# EAGLE board CT_schematic (EAGLE 7.6.0)

Size 100 x 80 mm. Coordinates in mm from the lower left corner, seen from the top.
Outline: 0,0 100,0 100,80 0,80 0,0
Copper layers (1*16): Top 0.035mm / dielectric 1.5mm / Bottom 0.035mm
Design rules "default": minimum track width 10mil, minimum drill 24mil, track to track 8mil, track to pad 8mil, pad to pad 8mil, via to via 8mil, smd to smd 8mil, copper to edge 40mil, drill to drill 8mil, minimum pad ring 10mil, minimum via ring 8mil, stop-mask expansion 4mil, vias tented up to drill 0mil, thermal gap 10mil

## Footprints (pad centres in the part's own frame; a part is rotated, then mirrored left to right if it is on the bottom)
C0603 = smd 0.8 x 0.8: 1 -0.762,0; 2 0.762,0
C0402 = smd 0.5 x 0.5: 1 -0.508,0; 2 0.508,0
C1206 = smd 1.3 x 1.6: 1 -1.524,0; 2 1.524,0
C0805 = smd 1.2 x 1.3: 1 -1.016,0; 2 1.016,0
C1210 = smd 1.2 x 2.5: 1 -1.524,0; 2 1.524,0
R0603 = smd 0.8 x 0.8: 1 -0.762,0; 2 0.762,0
EXV-9H = smd 3.505 x 1.676: 1 -2.857,0; 2 2.857,0
L0603 = smd 0.8 x 0.8: 1 -0.762,0; 2 0.762,0
DR1040 = smd 1.6 x 3.2: 1 -4.458,0; 2 4.458,0
PJ-037B_PACKAGE = drill 3.7 square: 1 12,0 | drill 3.2 square: 2 6,0
TFBGA216 = smd 0.4 x 0.4: A1 -5.6,5.6; A2 -4.8,5.6; A3 -4,5.6; A4 -3.2,5.6; A5 -2.4,5.6; A6 -1.6,5.6; A7 -0.8,5.6; A8 0,5.6; A9 0.8,5.6; A10 1.6,5.6; A11 2.4,5.6; A12 3.2,5.6; A13 4,5.6; A14 4.8,5.6; A15 5.6,5.6; B1 -5.6,4.8; B2 -4.8,4.8; B3 -4,4.8; B4 -3.2,4.8; B5 -2.4,4.8; B6 -1.6,4.8; B7 -0.8,4.8; B8 0,4.8; B9 0.8,4.8; B10 1.6,4.8; B11 2.4,4.8; B12 3.2,4.8; B13 4,4.8; B14 4.8,4.8; B15 5.6,4.8; C1 -5.6,4; C2 -4.8,4; C3 -4,4; C4 -3.2,4; C5 -2.4,4; C6 -1.6,4; C7 -0.8,4; C8 0,4; C9 0.8,4; C10 1.6,4; C11 2.4,4; C12 3.2,4; C13 4,4; C14 4.8,4; C15 5.6,4; D1 -5.6,3.2; D2 -4.8,3.2; D3 -4,3.2; D4 -3.2,3.2; D5 -2.4,3.2; D6 -1.6,3.2; D7 -0.8,3.2; D8 0,3.2; D9 0.8,3.2; D10 1.6,3.2; D11 2.4,3.2; D12 3.2,3.2; D13 4,3.2; D14 4.8,3.2; D15 5.6,3.2; E1 -5.6,2.4; E2 -4.8,2.4; E3 -4,2.4; E4 -3.2,2.4; E5 -2.4,2.4; E6 -1.6,2.4; E7 -0.8,2.4; E8 0,2.4; E9 0.8,2.4; E10 1.6,2.4; E11 2.4,2.4; E12 3.2,2.4; E13 4,2.4; E14 4.8,2.4; E15 5.6,2.4; F1 -5.6,1.6; F2 -4.8,1.6; F3 -4,1.6; F4 -3.2,1.6; F5 -2.4,1.6; F6 -1.6,1.6; F7 -0.8,1.6; F8 0,1.6; F9 0.8,1.6; F10 1.6,1.6; F11 2.4,1.6; F12 3.2,1.6; F13 4,1.6; F14 4.8,1.6; F15 5.6,1.6; G1 -5.6,0.8; G2 -4.8,0.8; G3 -4,0.8; G4 -3.2,0.8; G5 -2.4,0.8; G6 -1.6,0.8; G10 1.6,0.8; G11 2.4,0.8; G12 3.2,0.8; G13 4,0.8; G14 4.8,0.8; G15 5.6,0.8; H1 -5.6,0; H2 -4.8,0; H3 -4,0; H4 -3.2,0; H5 -2.4,0; H6 -1.6,0; H10 1.6,0; H11 2.4,0; H12 3.2,0; H13 4,0; H14 4.8,0; H15 5.6,0; J1 -5.6,-0.8; J2 -4.8,-0.8; J3 -4,-0.8; J4 -3.2,-0.8; J5 -2.4,-0.8; J6 -1.6,-0.8; J10 1.6,-0.8; J11 2.4,-0.8; J12 3.2,-0.8; J13 4,-0.8; J14 4.8,-0.8; J15 5.6,-0.8; K1 -5.6,-1.6; K2 -4.8,-1.6; K3 -4,-1.6; K4 -3.2,-1.6; K5 -2.4,-1.6; K6 -1.6,-1.6; K7 -0.8,-1.6; K8 0,-1.6; K9 0.8,-1.6; K10 1.6,-1.6; K11 2.4,-1.6; K12 3.2,-1.6; K13 4,-1.6; K14 4.8,-1.6; K15 5.6,-1.6; L1 -5.6,-2.4; L2 -4.8,-2.4; L3 -4,-2.4; L4 -3.2,-2.4; L5 -2.4,-2.4; L6 -1.6,-2.4; L7 -0.8,-2.4; L8 0,-2.4; L9 0.8,-2.4; L10 1.6,-2.4; L11 2.4,-2.4; L12 3.2,-2.4; L13 4,-2.4; L14 4.8,-2.4; L15 5.6,-2.4; M1 -5.6,-3.2; M2 -4.8,-3.2; M3 -4,-3.2; M4 -3.2,-3.2; M5 -2.4,-3.2; M6 -1.6,-3.2; M7 -0.8,-3.2; M8 0,-3.2; M9 0.8,-3.2; M10 1.6,-3.2; M11 2.4,-3.2; M12 3.2,-3.2; M13 4,-3.2; M14 4.8,-3.2; M15 5.6,-3.2; N1 -5.6,-4; N2 -4.8,-4; N3 -4,-4; N4 -3.2,-4; N5 -2.4,-4; N6 -1.6,-4; N7 -0.8,-4; N8 0,-4; N9 0.8,-4; N10 1.6,-4; N11 2.4,-4; N12 3.2,-4; N13 4,-4; N14 4.8,-4; N15 5.6,-4; P1 -5.6,-4.8; P2 -4.8,-4.8; P3 -4,-4.8; P4 -3.2,-4.8; P5 -2.4,-4.8; P6 -1.6,-4.8; P7 -0.8,-4.8; P8 0,-4.8; P9 0.8,-4.8; P10 1.6,-4.8; P11 2.4,-4.8; P12 3.2,-4.8; P13 4,-4.8; P14 4.8,-4.8; P15 5.6,-4.8; R1 -5.6,-5.6; R2 -4.8,-5.6; R3 -4,-5.6; R4 -3.2,-5.6; R5 -2.4,-5.6; R6 -1.6,-5.6; R7 -0.8,-5.6; R8 0,-5.6; R9 0.8,-5.6; R10 1.6,-5.6; R11 2.4,-5.6; R12 3.2,-5.6; R13 4,-5.6; R14 4.8,-5.6; R15 5.6,-5.6
ARDUCAM = drill 1 pad 1.8 square: 1 0,0 | drill 1 pad 1.8: 2 0,2.54; 3 2.54,0; 4 2.54,2.54; 5 5.08,0; 6 5.08,2.54; 7 7.62,0; 8 7.62,2.54; 9 10.16,0; 10 10.16,2.54; 11 12.7,0; 12 12.7,2.54; 13 15.24,0; 14 15.24,2.54; 15 17.78,0; 16 17.78,2.54; 17 20.32,0; 18 20.32,2.54; 19 22.86,0; 20 22.86,2.54
SOIC-8 = smd 1.6 x 0.6: 1 -2.7,1.905 | smd 1.55 x 0.6: 2 -2.7,0.635; 3 -2.7,-0.635; 4 -2.7,-1.905; 5 2.7,-1.905; 6 2.7,-0.635; 7 2.7,0.635; 8 2.7,1.905
PC28F512P33BFD = smd 0.45 x 0.45: A1 0,0; A2 1,0; A3 2,0; A4 3,0; A5 4,0; A6 5,0; A7 6,0; A8 7,0; B1 0,-1; B2 1,-1; B3 2,-1; B4 3,-1; B5 4,-1; B6 5,-1; B7 6,-1; B8 7,-1; C1 0,-2; C2 1,-2; C3 2,-2; C4 3,-2; C5 4,-2; C6 5,-2; C7 6,-2; C8 7,-2; D1 0,-3; D2 1,-3; D3 2,-3; D4 3,-3; D5 4,-3; D6 5,-3; D7 6,-3; D8 7,-3; E1 0,-4; E2 1,-4; E3 2,-4; E4 3,-4; E5 4,-4; E6 5,-4; E7 6,-4; E8 7,-4; F1 0,-5; F2 1,-5; F3 2,-5; F4 3,-5; F5 4,-5; F6 5,-5; F7 6,-5; F8 7,-5; G1 0,-6; G2 1,-6; G3 2,-6; G4 3,-6; G5 4,-6; G6 5,-6; G7 6,-6; G8 7,-6; H1 0,-7; H2 1,-7; H3 2,-7; H4 3,-7; H5 4,-7; H6 5,-7; H7 6,-7; H8 7,-7
RTL8201FL-VB-CG = smd 0.27 x 1: 1 0,0; 2 0.5,0; 3 1,0; 4 1.5,0; 5 2,0; 6 2.5,0; 7 3,0; 8 3.5,0; 9 4,0; 10 4.5,0; 11 5,0; 12 5.5,0; 25 5.5,8; 26 5,8; 27 4.5,8; 28 4,8; 29 3.5,8; 30 3,8; 31 2.5,8; 32 2,8; 33 1.5,8; 34 1,8; 35 0.5,8; 36 0,8 | smd 1 x 0.27: 13 6.75,1.25; 14 6.75,1.75; 15 6.75,2.25; 16 6.75,2.75; 17 6.75,3.25; 18 6.75,3.75; 19 6.75,4.25; 20 6.75,4.75; 21 6.75,5.25; 22 6.75,5.75; 23 6.75,6.25; 24 6.75,6.75; 37 -1.25,6.75; 38 -1.25,6.25; 39 -1.25,5.75; 40 -1.25,5.25; 41 -1.25,4.75; 42 -1.25,4.25; 43 -1.25,3.75; 44 -1.25,3.25; 45 -1.25,2.75; 46 -1.25,2.25; 47 -1.25,1.75; 48 -1.25,1.25
7498011122R = smd 0.71 x 2.29: 1 -3.545,-3.18; 2 -2.525,-3.18; 3 -1.505,-3.18; 4 -0.485,-3.18; 5 0.535,-3.18; 6 1.555,-3.18; 8 3.595,-3.18; 9 5.635,-3.18; 10 6.655,-3.18; 11 -6.605,-3.18; 12 -5.585,-3.18 | smd 1.4 x 2.54: 13 -8.51,10.2; 14 8.51,10.2 | hole 1.4: -3.5,0; 3.5,0
QFN-32 = smd 0.6 x 0.3: 1 -2.3,1.75; 2 -2.3,1.25; 3 -2.3,0.75; 4 -2.3,0.25; 5 -2.3,-0.25; 6 -2.3,-0.75; 7 -2.3,-1.25; 8 -2.3,-1.75; 17 2.3,-1.75; 18 2.3,-1.25; 19 2.3,-0.75; 20 2.3,-0.25; 21 2.3,0.25; 22 2.3,0.75; 23 2.3,1.25; 24 2.3,1.75 | smd 0.3 x 0.6: 9 -1.75,-2.3; 10 -1.25,-2.3; 11 -0.75,-2.3; 12 -0.25,-2.3; 13 0.25,-2.3; 14 0.75,-2.3; 15 1.25,-2.3; 16 1.75,-2.3; 25 1.75,2.3; 26 1.25,2.3; 27 0.75,2.3; 28 0.25,2.3; 29 -0.25,2.3; 30 -0.75,2.3; 31 -1.25,2.3; 32 -1.75,2.3 | smd 3.2 x 3.2: EXP 0,0
SJ-43515TS-SMT-TR = smd 2.2 x 3: 1 0.6,-7.4; 4 3.4,-7.4 | smd 3 x 3: 2 12.8,-7.4; 5 17,-3 | smd 2 x 3: 3 5.3,0; 6 2.5,0 | drill 1.8: P$7 4.5,-3.69; P$8 11.54,-3.69
WM-64PC = drill 0.6 pad 1: 1 -1,0.95; 2 -1,-0.95
ABLS-25.000MHZ-B2F-T = smd 5.6 x 2.8: 1 -3.81,0; 2 5.69,0
ASEK = smd 1.4 x 1: 1 -1.1,-0.8; 2 1.1,-0.8; 3 1.1,0.8; 4 -1.1,0.8
ASFL1 = smd 1.7 x 1.5: 1 -1.27,-1.1; 2 1.27,-1.1; 3 1.27,1.1; 4 -1.27,1.1
IDT74FCT38072 = smd 0.51 x 1: 1 0,0; 2 1.27,0; 3 2.54,0; 4 3.81,0; 5 3.81,4.95; 6 2.54,4.95; 7 1.27,4.95; 8 0,4.95
WSON-8 = smd 0.3 x 0.6: 1 -0.75,0; 2 0.05,0; 3 0.85,0; 4 1.65,0; 5 1.65,3.8; 6 0.85,3.8; 7 0.05,3.8; 8 -0.75,3.8 | smd 3 x 2.6: PAD 0.45,1.9
HTSSOP14 = smd 1.676 x 0.356: 1 -2.8,1.95; 2 -2.8,1.3; 3 -2.8,0.65; 4 -2.8,0; 5 -2.8,-0.65; 6 -2.8,-1.3; 7 -2.8,-1.95; 8 2.8,-1.95; 9 2.8,-1.3; 10 2.8,-0.65; 11 2.8,0; 12 2.8,0.65; 13 2.8,1.3; 14 2.8,1.95 | smd 3 x 5: 15 0,0 | drill 0.4 pad 0.45: P$1 -0.75,1.5; P$2 0.75,1.5; P$3 -0.75,0; P$4 0.8,0; P$5 -0.75,-1.5; P$6 0.9,-1.5
QFN-38_UHF = smd 0.75 x 0.3: 1 -2.4,2.75; 2 -2.4,2.25; 3 -2.4,1.75; 4 -2.4,1.25; 6 -2.4,0.25; 7 -2.4,-0.25; 8 -2.4,-0.75; 9 -2.4,-1.25; 10 -2.4,-1.75; 11 -2.4,-2.25; 12 -2.4,-2.75; 20 2.4,-2.75; 21 2.4,-2.25; 22 2.4,-1.75; 23 2.4,-1.25; 24 2.4,-0.75; 25 2.4,-0.25; 26 2.4,0.25; 27 2.4,0.75; 28 2.4,1.25; 29 2.4,1.75; 30 2.4,2.25; 31 2.4,2.75 | smd 0.758 x 0.3: 5 -2.4,0.75 | smd 0.3 x 0.75: 13 -1.5,-3.4; 14 -1,-3.4; 15 -0.5,-3.4; 16 0,-3.4; 17 0.5,-3.4; 18 1,-3.4; 19 1.5,-3.4; 32 1.5,3.4; 33 1,3.4; 34 0.5,3.4; 35 0,3.4; 36 -0.5,3.4; 37 -1,3.4; 38 -1.5,3.4 | smd 3.2 x 5.2: 39 0,0
IRF8306MTRPBF = smd 0.9 x 1.85: 1 0,0; 2 0,-2.35; 6 6.4,0; 7 6.4,-2.35 | smd 0.75 x 0.75: 3 1.75,-1.175 | smd 1.45 x 0.87: 4 3.5,-0.565; 5 3.5,-1.785
SW_4-1437565-2 = smd 1.4 x 2.1: 1 -2.23,4.55; 2 -2.23,-4.55; 3 2.23,4.55; 4 2.23,-4.55
LGM67K-G1J2-24-Z = smd 0.8 x 1.4: A -2,0; C 0,0
NC7SZ125M5X = smd 1.3 x 0.7: 1 -1.3,0.95; 2 -1.3,0; 3 -1.3,-0.95; 4 1.3,-0.95; 5 1.3,0.95

## Placement (x,y rotation side)
C1  1e-06  [C0603]  -46.99,93.98 0 top  (outside the outline)
C2  1e-07  [C0603]  -50.8,93.98 0 top  (outside the outline)
C3  1e-07  [C0603]  -54.61,93.98 0 top  (outside the outline)
C4  1e-07  [C0603]  -58.42,93.98 0 top  (outside the outline)
C5  1e-07  [C0603]  -62.23,93.98 0 top  (outside the outline)
C6  1e-07  [C0603]  -66.04,93.98 0 top  (outside the outline)
C7  1e-07  [C0603]  -69.85,93.98 0 top  (outside the outline)
C8  1e-07  [C0603]  -73.66,93.98 0 top  (outside the outline)
C9  1e-07  [C0603]  -77.47,93.98 0 top  (outside the outline)
C10  1e-07  [C0603]  -81.28,93.98 0 top  (outside the outline)
C11  1e-07  [C0603]  -85.09,93.98 0 top  (outside the outline)
C12  1e-07  [C0603]  -88.9,93.98 0 top  (outside the outline)
C13  1e-07  [C0603]  -92.71,93.98 0 top  (outside the outline)
C14  1e-07  [C0603]  -96.52,93.98 0 top  (outside the outline)
C15  1e-07  [C0603]  -100.33,93.98 0 top  (outside the outline)
C16  1e-07  [C0603]  -15.24,99.06 0 top  (outside the outline)
C17  1e-07  [C0603]  -19.05,99.06 0 top  (outside the outline)
C18  1e-07  [C0603]  -22.86,99.06 0 top  (outside the outline)
C19  1e-07  [C0603]  -26.67,99.06 0 top  (outside the outline)
C20  1e-07  [C0603]  -30.48,99.06 0 top  (outside the outline)
C21  1e-07  [C0603]  -34.29,99.06 0 top  (outside the outline)
C22  4.7e-06  [C0603]  -39.37,93.98 0 top  (outside the outline)
C23  1e-07  [C0603]  -38.1,99.06 0 top  (outside the outline)
C24  1e-08  [C0603]  -41.91,99.06 0 top  (outside the outline)
C25  1e-06  [C0603]  -45.72,99.06 0 top  (outside the outline)
C26  1e-07  [C0603]  -49.53,99.06 0 top  (outside the outline)
C27  1e-07  [C0603]  -53.34,99.06 0 top  (outside the outline)
C28  1e-07  [C0603]  -57.15,99.06 0 top  (outside the outline)
C29  1e-11  [C0402]  -15.24,109.22 0 top  (outside the outline)
C30  1e-11  [C0402]  -19.05,109.22 0 top  (outside the outline)
C31  1e-06  [C0603]  -60.96,99.06 0 top  (outside the outline)
C32  1e-08  [C0402]  -22.86,109.22 0 top  (outside the outline)
C33  1e-07  [C0402]  -26.67,109.22 0 top  (outside the outline)
C34  1e-08  [C0402]  -30.48,109.22 0 top  (outside the outline)
C35  1e-07  [C0402]  -34.29,109.22 0 top  (outside the outline)
C36  1e-08  [C0402]  -38.1,109.22 0 top  (outside the outline)
C37  1e-07  [C0402]  -41.91,109.22 0 top  (outside the outline)
C38  1e-08  [C0402]  -45.72,109.22 0 top  (outside the outline)
C39  2.2e-08  [C0402]  -100.33,104.14 0 top  (outside the outline)
C40  1e-06  [C0603]  -64.77,99.06 0 top  (outside the outline)
C41  1e-07  [C0402]  -49.53,109.22 0 top  (outside the outline)
C42  1e-08  [C0402]  -53.34,109.22 0 top  (outside the outline)
C43  1e-06  [C0603]  -68.58,99.06 0 top  (outside the outline)
C44  1e-07  [C0402]  -57.15,109.22 0 top  (outside the outline)
C45  1e-08  [C0402]  -60.96,109.22 0 top  (outside the outline)
C46  1e-07  [C0402]  -64.77,109.22 0 top  (outside the outline)
C47  1e-07  [C0402]  -68.58,109.22 0 top  (outside the outline)
C48  1e-06  [C0603]  -72.39,99.06 0 top  (outside the outline)
C49  1e-06  [C0603]  -76.2,99.06 0 top  (outside the outline)
C50  1e-06  [C0603]  -80.01,99.06 0 top  (outside the outline)
C51  1e-06  [C0603]  -83.82,99.06 0 top  (outside the outline)
C52  1e-06  [C0603]  -87.63,99.06 0 top  (outside the outline)
C53  1e-06  [C0603]  -91.44,99.06 0 top  (outside the outline)
C54  1e-06  [C0603]  -95.25,99.06 0 top  (outside the outline)
C55  1e-07  [C0402]  -72.39,109.22 0 top  (outside the outline)
C56  1e-07  [C0402]  -76.2,109.22 0 top  (outside the outline)
C57  1e-07  [C0402]  -80.01,109.22 0 top  (outside the outline)
C58  1e-07  [C0402]  -83.82,109.22 0 top  (outside the outline)
C59  1e-06  [C0603]  -99.06,99.06 0 top  (outside the outline)
C60  1e-08  [C0402]  -87.63,109.22 0 top  (outside the outline)
C61  1e-08  [C0402]  -91.44,109.22 0 top  (outside the outline)
C62  1e-08  [C0402]  -95.25,109.22 0 top  (outside the outline)
C63  1e-08  [C0402]  -99.06,109.22 0 top  (outside the outline)
C64  1e-08  [C0402]  -102.87,109.22 0 top  (outside the outline)
C65  1e-05  [C1206]  -81.28,76.2 0 top  (outside the outline)
C66  1e-05  [C0805]  -40.64,83.82 0 top  (outside the outline)
C67  1e-06  [C0603]  -102.87,99.06 0 top  (outside the outline)
C68  3.3e-09  [C0402]  -104.14,104.14 0 top  (outside the outline)
C69  1e-07  [C0402]  -15.24,114.3 0 top  (outside the outline)
C70  2.2e-05  [C1210]  -68.58,76.2 0 top  (outside the outline)
C71  2.2e-05  [C1210]  -74.93,76.2 0 top  (outside the outline)
C72  1e-05  [C1206]  -87.63,76.2 0 top  (outside the outline)
C73  1e-05  [C1206]  -93.98,76.2 0 top  (outside the outline)
C74  1e-08  [C0402]  -19.05,114.3 0 top  (outside the outline)
C75  1e-05  [C1206]  -100.33,76.2 0 top  (outside the outline)
C76  1e-05  [C0805]  -45.72,83.82 0 top  (outside the outline)
C77  1e-07  [C0402]  -22.86,114.3 0 top  (outside the outline)
C78  2.2e-06  [C0603]  -43.18,93.98 0 top  (outside the outline)
C79  2.45e-08  [R0603]  -83.82,82.55 0 top  (outside the outline)
C80  2.8258362168397e-09  [R0603]  -55.88,82.55 0 top  (outside the outline)
C81  7.105e-09  [R0603]  -68.58,82.55 0 top  (outside the outline)
C82  0.0001  [EXV-9H]  -64.77,68.58 0 top  (outside the outline)
C83  0.0001  [EXV-9H]  -76.2,68.58 0 top  (outside the outline)
C84  1e-08  [C0402]  -26.67,114.3 0 top  (outside the outline)
C85  1e-08  [C0402]  -30.48,114.3 0 top  (outside the outline)
C86  1e-08  [C0402]  -34.29,114.3 0 top  (outside the outline)
C87  1e-08  [C0402]  -38.1,114.3 0 top  (outside the outline)
F1  240.0  [L0603]  -15.24,104.14 0 top  (outside the outline)
I1  97.0  [R0603]  -19.05,104.14 0 top  (outside the outline)
I5  2.5e-06  [DR1040]  -38.1,48.26 0 top  (outside the outline)
J1  PJ-037B  [PJ-037B_PACKAGE]  -72.39,35.56 0 top  (outside the outline)
R2  1000.0  [R0603]  -22.86,104.14 0 top  (outside the outline)
R7  4700.0  [R0603]  -26.67,104.14 0 top  (outside the outline)
R8  4700.0  [R0603]  -30.48,104.14 0 top  (outside the outline)
R9  4700.0  [R0603]  -34.29,104.14 0 top  (outside the outline)
R10  4700.0  [R0603]  -38.1,104.14 0 top  (outside the outline)
R11  2200.0  [R0603]  -41.91,104.14 0 top  (outside the outline)
R13  2200.0  [R0603]  -45.72,104.14 0 top  (outside the outline)
R15  2200.0  [R0603]  -49.53,104.14 0 top  (outside the outline)
R19  10000.0  [R0603]  -88.9,82.55 0 top  (outside the outline)
R20  10000.0  [R0603]  -93.98,82.55 0 top  (outside the outline)
R21  10000.0  [R0603]  -99.06,82.55 0 top  (outside the outline)
R22  10000.0  [R0603]  -15.24,88.9 0 top  (outside the outline)
R23  10000.0  [R0603]  -20.32,88.9 0 top  (outside the outline)
R24  10000.0  [R0603]  -25.4,88.9 0 top  (outside the outline)
R25  10000.0  [R0603]  -30.48,88.9 0 top  (outside the outline)
R26  10000.0  [R0603]  -35.56,88.9 0 top  (outside the outline)
R27  10000.0  [R0603]  -40.64,88.9 0 top  (outside the outline)
R28  0.1  [R0603]  -53.34,104.14 0 top  (outside the outline)
R29  0.1  [R0603]  -57.15,104.14 0 top  (outside the outline)
R30  200.0  [R0603]  -60.96,104.14 0 top  (outside the outline)
R31  200.0  [R0603]  -64.77,104.14 0 top  (outside the outline)
R32  2490.0  [R0603]  -68.58,104.14 0 top  (outside the outline)
R33  4700.0  [R0603]  -72.39,104.14 0 top  (outside the outline)
R34  10000.0  [R0603]  -45.72,88.9 0 top  (outside the outline)
R35  10000.0  [R0603]  -50.8,88.9 0 top  (outside the outline)
R36  10000.0  [R0603]  -55.88,88.9 0 top  (outside the outline)
R37  10000.0  [R0603]  -60.96,88.9 0 top  (outside the outline)
R38  10000.0  [R0603]  -66.04,88.9 0 top  (outside the outline)
R39  10000.0  [R0603]  -71.12,88.9 0 top  (outside the outline)
R40  1270.0  [R0603]  -76.2,104.14 0 top  (outside the outline)
R41  1270.0  [R0603]  -80.01,104.14 0 top  (outside the outline)
R42  100000.0  [R0603]  -73.66,82.55 0 top  (outside the outline)
R43  200.0  [R0603]  -83.82,104.14 0 top  (outside the outline)
R44  1000.0  [R0603]  -87.63,104.14 0 top  (outside the outline)
R45  71007.101651032  [R0603]  -63.5,82.55 0 top  (outside the outline)
R46  22000.0  [R0603]  -76.2,88.9 0 top  (outside the outline)
R47  100000.0  [R0603]  -78.74,82.55 0 top  (outside the outline)
R48  200.0  [R0603]  -91.44,104.14 0 top  (outside the outline)
R49  1000.0  [R0603]  -95.25,104.14 0 top  (outside the outline)
R50  10000.0  [R0603]  -81.28,88.9 0 top  (outside the outline)
R51  75000.0  [R0603]  -86.36,88.9 0 top  (outside the outline)
R52  10000.0  [R0603]  -91.44,88.9 0 top  (outside the outline)
R53  10000.0  [R0603]  -96.52,88.9 0 top  (outside the outline)
R54  95300.0  [R0603]  -101.6,88.9 0 top  (outside the outline)
R55  95300.0  [R0603]  -15.24,93.98 0 top  (outside the outline)
R56  10000.0  [R0603]  -20.32,93.98 0 top  (outside the outline)
R57  10000.0  [R0603]  -25.4,93.98 0 top  (outside the outline)
R58  10000.0  [R0603]  -30.48,93.98 0 top  (outside the outline)
R59  82000.0  [R0603]  -35.56,93.98 0 top  (outside the outline)
U1  STM32F777NIH6  [TFBGA216]  -43.18,8.89 0 top  (outside the outline)
U2  arducam_ov2640  [ARDUCAM]  -40.64,74.93 0 top  (outside the outline)
U3  M24M02-DRMN6TP  [SOIC-8]  -82.55,48.26 0 top  (outside the outline)
U4  PC28F512P33BFD  [PC28F512P33BFD]  -88.9,38.1 0 top  (outside the outline)
U5  RTL8201FL-VB-CG  [RTL8201FL-VB-CG]  -55.88,31.75 0 top  (outside the outline)
U6  7498011122R  [7498011122R]  -22.86,7.62 0 top  (outside the outline)
U7  SGTL5000XNAA3  [QFN-32]  -64.77,48.26 0 top  (outside the outline)
U8  SJ-43515TS-SMT-TR  [SJ-43515TS-SMT-TR]  -76.2,10.16 0 top  (outside the outline)
U9  SJ-43515TS-SMT-TR  [SJ-43515TS-SMT-TR]  -104.14,10.16 0 top  (outside the outline)
U10  SJ-43515TS-SMT-TR  [SJ-43515TS-SMT-TR]  -39.37,38.1 0 top  (outside the outline)
U11  WM-64PCT  [WM-64PC]  -50.8,48.26 0 top  (outside the outline)
U12  ABLS-25.000MHZ-B2F-T  [ABLS-25.000MHZ-B2F-T]  -95.25,68.58 0 top  (outside the outline)
U13  ASEK-32.768KHz-ECST  [ASEK]  -55.88,68.58 0 top  (outside the outline)
U14  ASFL-24.57MHZ-NCS  [ASFL1]  -83.82,59.69 0 top  (outside the outline)
U15  ASFL1-25MHZ-NCS  [ASFL1]  -100.33,59.69 0 top  (outside the outline)
U16  idt74fct38072  [IDT74FCT38072]  -38.1,66.04 0 top  (outside the outline)
U17  LP3878SDX-ADJ/NOPB  [WSON-8]  -45.72,58.42 0 top  (outside the outline)
U18  tps54525PWP  [HTSSOP14]  -48.26,76.2 0 top  (outside the outline)
U19  LP3878SDX-ADJ/NOPB  [WSON-8]  -66.04,58.42 0 top  (outside the outline)
U20  LTC2928CUHF#PBF  [QFN-38_UHF]  -16.51,68.58 0 top  (outside the outline)
U21  IRF8306MTRPbF  [IRF8306MTRPBF]  -100.33,49.53 0 top  (outside the outline)
U22  IRF8306MTRPbF  [IRF8306MTRPBF]  -26.67,60.96 0 top  (outside the outline)
U23  4-1437565-2  [SW_4-1437565-2]  -27.94,49.53 0 top  (outside the outline)
U24  Q65110A2395  [LGM67K-G1J2-24-Z]  -57.15,76.2 0 top  (outside the outline)
U25  nc7sz125m5x  [NC7SZ125M5X]  -15.24,82.55 0 top  (outside the outline)
U26  nc7sz125m5x  [NC7SZ125M5X]  -21.59,82.55 0 top  (outside the outline)
U27  nc7sz125m5x  [NC7SZ125M5X]  -27.94,82.55 0 top  (outside the outline)
U28  nc7sz125m5x  [NC7SZ125M5X]  -34.29,82.55 0 top  (outside the outline)

## Library data of the parts
C1-C87 F1 I1 I5 J1 R2 R7-R11 R13 R15 R19-R59 U1-U28 = circuit_tree

## Nets
CLK_CRYSTAL_U1_G1: C29.1 U1.G1 U12.1
CLK_CRYSTAL_U1_H1: C30.1 U1.H1 U12.2
CLK_U1_E1: U1.E1 U13.3
CLK_U2_8: U2.8 U16.7
CLK_U5_43: U5.43 U16.6
CLK_U7_21: U7.21 U14.3
CLK_U16_3: U15.3 U16.3
GND: C1.2 C2.2 C3.2 C4.2 C5.2 C6.2 C7.2 C8.2 C9.2 C10.2 C11.2 C12.2 C13.2 C14.2 C15.2 C16.2 C17.2 C18.2 C19.2 C20.2 C21.2 C22.2 C23.2 C24.2 C25.2 C26.2 C27.2 C28.2 C29.2 C30.2 C31.2 C32.2 C33.2 C34.2 C35.2 C36.2 C37.2 C38.2 C39.2 C40.2 C41.2 C42.2 C43.2 C44.2 C45.2 C46.2 C47.2 C55.2 C56.2 C57.2 C58.2 C59.2 C60.2 C61.2 C62.2 C63.2 C64.2 C65.2 C66.2 C67.2 C68.2 C70.2 C71.2 C72.2 C73.2 C74.2 C75.2 C76.2 C77.2 C78.2 C79.2 C80.2 C81.2 C82.2 C83.2 C84.2 C85.2 C86.2 C87.2 J1.2 R2.2 R19.2 R22.2 R28.2 R29.2 R32.2 R34.2 R35.2 R37.2 R39.2 R41.2 R44.2 R46.2 R49.2 R51.2 R54.2 R55.2 R56.2 R57.2 R58.2 U1.F2 U1.F6 U1.F7 U1.F8 U1.F9 U1.F10 U1.G6 U1.G10 U1.H6 U1.H10 U1.J6 U1.J10 U1.K6 U1.K7 U1.K8 U1.K9 U1.K10 U1.L6 U1.M1 U1.N1 U2.2 U2.20 U3.4 U4.B2 U4.H2 U4.H4 U4.H6 U5.7 U5.20 U5.33 U5.42 U5.47 U6.9 U7.1 U7.3 U7.7 U7.EXP U9.1 U10.1 U11.2 U13.2 U14.2 U15.2 U16.4 U16.5 U16.8 U17.3 U17.PAD U18.5 U18.8 U18.9 U18.15 U19.3 U19.PAD U20.8 U20.9 U20.10 U20.12 U20.13 U20.24 U20.25 U20.30 U20.32 U20.39 U24.C U25.1 U25.3 U26.1 U26.3 U27.1 U27.3 U28.1 U28.3
NET_U1_B4: R13.1 U1.B4 U3.5
NET_U1_B6: R11.1 U1.B6 U3.6
NET_U1_E5: R20.1 U1.E5
NET_U1_E6: R19.1 U1.E6
NET_U1_E11: C28.1 U1.E11
NET_U1_J1: R9.1 U1.J1 U27.4
NET_U1_L5: R21.1 U1.L5
NET_U1_M3: R15.1 U1.M3 U5.30
NET_U1_P2: U5.31
NET_U1_R1: C24.1 C25.1 F1.1 U1.P1 U1.R1
NET_U1_R14: U24.A
NET_U1_R15: U23.3 U23.4
NET_U2_19: R10.1 U2.19 U28.4
NET_U3_3: R22.1 U3.3
NET_U4_A4: C37.1 C38.1 U4.A4
NET_U4_C6: R26.1 U4.C6
NET_U4_D4: R8.1 U4.D4 U26.4
NET_U5_6: C40.1 C41.1 C42.1 I1.1 U5.6 U5.41
NET_U5_10: R37.1 U5.10
NET_U5_28: U5.28
NET_U5_29: R7.1 U5.29 U25.4
NET_U5_32: R33.1 U5.32
NET_U5_34: R35.1 U5.34
NET_U5_35: R36.1 U5.35
NET_U5_40: C47.1 U5.40
NET_U5_46: R32.1 U5.46
NET_U5_48: C46.1 U5.48
NET_U6_1: U5.1 U6.1
NET_U6_3: U5.2 U6.3
NET_U6_4: U5.4 U6.4
NET_U6_5: C39.1 U6.2 U6.5
NET_U6_6: U5.5 U6.6
NET_U6_8: R29.1 U6.8
NET_U6_10: R30.1 U6.10
NET_U6_12: R31.1 U6.12
NET_U6_13: R28.1 U6.13 U6.14
NET_U6_34: R30.2
NET_U6_35: R31.2
NET_U7_10: C58.1 U7.10
NET_U7_29: R40.1 U7.29
NET_U7_31: R41.1 U7.31
NET_U8_1: U7.4 U8.1
NET_U8_2: U7.2 U8.2
NET_U8_5: U7.6 U8.5
NET_U9_2: C49.1 U9.2
NET_U9_5: C48.1 U9.5
NET_U9_11: C49.2
NET_U9_12: C48.2
NET_U10_2: C51.1 C52.1 U10.2
NET_U10_5: C50.1 U10.5
NET_U10_13: C51.2 C52.2
NET_U10_14: C50.2
NET_U11_1: C53.1 C54.1 C59.1 U7.16 U11.1
NET_U11_15: C53.2 C54.2
NET_U17_1: C64.1 U17.1
NET_U17_6: R43.2 R44.1 U17.6
NET_U17_8: R42.1 U17.8
NET_U18_2: R45.2 R46.1 U18.2
NET_U18_3: C67.1 U18.3
NET_U18_4: C68.1 U18.4
NET_U18_10: C69.1 I5.1 U18.10 U18.11
NET_U18_12: C69.2 U18.12
NET_U19_1: C74.1 U19.1
NET_U19_6: R48.2 R49.1 U19.6
NET_U19_8: R47.1 U19.8
NET_U20_3: R57.1 U20.3
NET_U20_6: R54.1 U20.6
NET_U20_7: R55.1 U20.7
NET_U20_16: R56.1 R59.1 U20.16
NET_U20_18: R53.1 U20.18
NET_U20_19: R52.1 U20.19 U20.20
NET_U20_21: R50.1 R51.1 U20.21 U25.2 U26.2 U27.2 U28.2
NET_U20_22: C77.1 R50.2 R52.2 R53.2 U20.11 U20.22
NET_U20_26: C80.1 U20.26
NET_U20_27: C79.1 U20.27
NET_U20_28: C81.1 U20.28
NET_U20_38: R58.1 U20.38
NET_U21_3: U20.2 U21.3
NET_U22_3: U20.37 U22.3
NET_U23_1: R2.1 U23.1 U23.2
PROC_DCMI_D0: U1.E15 U2.18
PROC_DCMI_D1: U1.D15 U2.17
PROC_DCMI_D2: U1.A6 U2.16
PROC_DCMI_D3: U1.A5 U2.15
PROC_DCMI_D4: U1.B13 U2.14
PROC_DCMI_D5: U1.C3 U2.13
PROC_DCMI_D6: U1.D6 U2.12
PROC_DCMI_D7: U1.D4 U2.11
PROC_DCMI_D8: U1.B14 U2.10
PROC_DCMI_D9: U1.A12 U2.9
PROC_DCMI_HSYNC: U1.N4 U2.6
PROC_DCMI_PIXCLK: U1.P3 U2.7
PROC_DCMI_VSYNC: U1.D3 U2.5
PROC_ETH_COL: U1.J4 U5.38
PROC_ETH_CRS: U1.K4 U5.36
PROC_ETH_RX_CLK: U1.N2 U5.19
PROC_ETH_RX_DV: R34.1 U5.13
PROC_ETH_RX_ER: R39.1 U1.D5 U5.39
PROC_ETH_RXD0: U5.14
PROC_ETH_RXD1: U5.16
PROC_ETH_RXD2: U5.17
PROC_ETH_RXD3: R38.1 U1.N13 U5.18
PROC_ETH_TX_CLK: U1.L4 U5.22
PROC_ETH_TX_EN: U1.B8 U5.27
PROC_ETH_TXD0: U1.L13 U5.23
PROC_ETH_TXD1: U1.A4 U5.24
PROC_ETH_TXD2: U1.M4 U5.25
PROC_ETH_TXD3: U1.A7 U5.26
PROC_FMC_A0: U1.D2 U4.A1
PROC_FMC_A1: U1.E2 U4.B1
PROC_FMC_A2: U1.G2 U4.C1
PROC_FMC_A3: U1.H2 U4.D1
PROC_FMC_A4: U1.J2 U4.D2
PROC_FMC_A5: U1.K3 U4.A2
PROC_FMC_A6: U1.M6 U4.C2
PROC_FMC_A7: U1.N6 U4.A3
PROC_FMC_A8: U1.P6 U4.B3
PROC_FMC_A9: U1.M8 U4.C3
PROC_FMC_A10: U1.N7 U4.D3
PROC_FMC_A11: U1.M7 U4.C4
PROC_FMC_A12: U1.M13 U4.A5
PROC_FMC_A13: U1.M12 U4.B5
PROC_FMC_A14: U1.N12 U4.C5
PROC_FMC_A15: U1.N11 U4.D7
PROC_FMC_A16: U1.N10 U4.D8
PROC_FMC_A17: U1.M10 U4.A7
PROC_FMC_A18: U1.M11 U4.B7
PROC_FMC_A19: U1.A2 U4.C7
PROC_FMC_A20: U1.A1 U4.C8
PROC_FMC_A21: U1.B1 U4.A8
PROC_FMC_A22: U1.B2 U4.G1
PROC_FMC_A23: U1.A3 U4.H8
PROC_FMC_A24: U1.B3 U4.B6
PROC_FMC_CLK: U1.C11 U4.E6
PROC_FMC_D0: U1.L12 U4.F2
PROC_FMC_D1: U1.K13 U4.E2
PROC_FMC_D2: U1.B12 U4.G3
PROC_FMC_D3: U1.C12 U4.E4
PROC_FMC_D4: U1.R8 U4.E5
PROC_FMC_D5: U1.N9 U4.G5
PROC_FMC_D6: U1.P9 U4.G6
PROC_FMC_D7: U1.R9 U4.H7
PROC_FMC_D8: U1.P10 U4.E1
PROC_FMC_D9: U1.R10 U4.E3
PROC_FMC_D10: U1.R12 U4.F3
PROC_FMC_D11: U1.P11 U4.F4
PROC_FMC_D12: U1.R11 U4.F5
PROC_FMC_D13: U1.L15 U4.H5
PROC_FMC_D14: U1.L14 U4.G7
PROC_FMC_D15: U1.K15 U4.E7
PROC_FMC_NE2: R24.1 U1.D9 U4.B4
PROC_FMC_NL: R23.1 U1.B5 U4.F6
PROC_FMC_NOE: R25.1 U1.D11 U4.F8
PROC_FMC_NWAIT: U1.B11 U4.F7
PROC_FMC_NWE: R27.1 U1.C10 U4.G8
PROC_I2S1_CK: U1.A10 U7.24
PROC_I2S1_SD: U1.A8 U7.26
PROC_I2S1_WS: U1.A13 U7.23
VCC_10V1: C78.1 C82.1 C83.1 J1.1 R59.2 U20.23 U21.1 U21.2 U21.6 U21.7 U22.1 U22.2 U22.6 U22.7
VCC_S1_10V1: C65.1 C72.1 C73.1 R42.2 U17.4 U18.7 U18.13 U18.14 U21.4 U21.5
VCC_S2_10V1: C75.1 R47.2 U19.4 U22.4 U22.5
VCC_TIER1_1V2: C27.1 C55.1 C66.1 R43.1 U1.L11 U7.30 U17.5
VCC_TIER1_3V3: C1.1 C2.1 C3.1 C4.1 C5.1 C6.1 C7.1 C8.1 C9.1 C10.1 C11.1 C12.1 C13.1 C14.1 C15.1 C16.1 C17.1 C18.1 C19.1 C20.1 C21.1 C22.1 C23.1 C26.1 C31.1 C32.1 C33.1 C34.1 C35.1 C36.1 C43.1 C44.1 C45.1 C56.1 C57.1 C60.1 C61.1 C62.1 C63.1 C70.1 C71.1 C84.1 C85.1 C86.1 C87.1 F1.2 I1.2 I5.2 R7.2 R8.2 R9.2 R10.2 R11.2 R13.2 R15.2 R20.2 R21.2 R23.2 R24.2 R25.2 R26.2 R27.2 R33.2 R36.2 R38.2 R40.2 R45.1 U1.C1 U1.E7 U1.E8 U1.E9 U1.E10 U1.F4 U1.F5 U1.F11 U1.G5 U1.G11 U1.H5 U1.H11 U1.J5 U1.J11 U1.K5 U1.K11 U1.L7 U1.L8 U1.L9 U1.L10 U2.1 U3.8 U4.A6 U4.D5 U4.D6 U4.G4 U4.H3 U5.15 U5.21 U5.37 U7.5 U7.20 U13.4 U14.4 U15.4 U16.1 U16.2 U18.1 U25.5 U26.5 U27.5 U28.5
VCC_TIER2_1V2: C76.1 R48.1 U19.5

## Tracks (layer width: path | path; a pad name or v marks a point on that pad's centre or on a via)
CLK_CRYSTAL_U1_G1  (2 unrouted)
CLK_CRYSTAL_U1_H1  (2 unrouted)
CLK_U1_E1  (1 unrouted)
CLK_U2_8  (1 unrouted)
CLK_U5_43  (1 unrouted)
CLK_U7_21  (1 unrouted)
CLK_U16_3  (1 unrouted)
GND  (172 unrouted)
NET_U1_B4  (2 unrouted)
NET_U1_B6  (2 unrouted)
NET_U1_E5  (1 unrouted)
NET_U1_E6  (1 unrouted)
NET_U1_E11  (1 unrouted)
NET_U1_J1  (2 unrouted)
NET_U1_L5  (1 unrouted)
NET_U1_M3  (2 unrouted)
NET_U1_R1  (4 unrouted)
NET_U1_R15  (1 unrouted)
NET_U2_19  (2 unrouted)
NET_U3_3  (1 unrouted)
NET_U4_A4  (2 unrouted)
NET_U4_C6  (1 unrouted)
NET_U4_D4  (2 unrouted)
NET_U5_6  (5 unrouted)
NET_U5_10  (1 unrouted)
NET_U5_29  (2 unrouted)
NET_U5_32  (1 unrouted)
NET_U5_34  (1 unrouted)
NET_U5_35  (1 unrouted)
NET_U5_40  (1 unrouted)
NET_U5_46  (1 unrouted)
NET_U5_48  (1 unrouted)
NET_U6_1  (1 unrouted)
NET_U6_3  (1 unrouted)
NET_U6_4  (1 unrouted)
NET_U6_5  (2 unrouted)
NET_U6_6  (1 unrouted)
NET_U6_8  (1 unrouted)
NET_U6_10  (1 unrouted)
NET_U6_12  (1 unrouted)
NET_U6_13  (2 unrouted)
NET_U7_10  (1 unrouted)
NET_U7_29  (1 unrouted)
NET_U7_31  (1 unrouted)
NET_U8_1  (1 unrouted)
NET_U8_2  (1 unrouted)
NET_U8_5  (1 unrouted)
NET_U9_2  (1 unrouted)
NET_U9_5  (1 unrouted)
NET_U10_2  (2 unrouted)
NET_U10_5  (1 unrouted)
NET_U10_13  (1 unrouted)
NET_U11_1  (4 unrouted)
NET_U11_15  (1 unrouted)
NET_U17_1  (1 unrouted)
NET_U17_6  (2 unrouted)
NET_U17_8  (1 unrouted)
NET_U18_2  (2 unrouted)
NET_U18_3  (1 unrouted)
NET_U18_4  (1 unrouted)
NET_U18_10  (3 unrouted)
NET_U18_12  (1 unrouted)
NET_U19_1  (1 unrouted)
NET_U19_6  (2 unrouted)
NET_U19_8  (1 unrouted)
NET_U20_3  (1 unrouted)
NET_U20_6  (1 unrouted)
NET_U20_7  (1 unrouted)
NET_U20_16  (2 unrouted)
NET_U20_18  (1 unrouted)
NET_U20_19  (2 unrouted)
NET_U20_21  (6 unrouted)
NET_U20_22  (5 unrouted)
NET_U20_26  (1 unrouted)
NET_U20_27  (1 unrouted)
NET_U20_28  (1 unrouted)
NET_U20_38  (1 unrouted)
NET_U21_3  (1 unrouted)
NET_U22_3  (1 unrouted)
NET_U23_1  (2 unrouted)
PROC_DCMI_D0  (1 unrouted)
PROC_DCMI_D1  (1 unrouted)
PROC_DCMI_D2  (1 unrouted)
PROC_DCMI_D3  (1 unrouted)
PROC_DCMI_D4  (1 unrouted)
PROC_DCMI_D5  (1 unrouted)
PROC_DCMI_D6  (1 unrouted)
PROC_DCMI_D7  (1 unrouted)
PROC_DCMI_D8  (1 unrouted)
PROC_DCMI_D9  (1 unrouted)
PROC_DCMI_HSYNC  (1 unrouted)
PROC_DCMI_PIXCLK  (1 unrouted)
PROC_DCMI_VSYNC  (1 unrouted)
PROC_ETH_COL  (1 unrouted)
PROC_ETH_CRS  (1 unrouted)
PROC_ETH_RX_CLK  (1 unrouted)
PROC_ETH_RX_DV  (1 unrouted)
PROC_ETH_RX_ER  (2 unrouted)
PROC_ETH_RXD3  (2 unrouted)
PROC_ETH_TX_CLK  (1 unrouted)
PROC_ETH_TX_EN  (1 unrouted)
PROC_ETH_TXD0  (1 unrouted)
PROC_ETH_TXD1  (1 unrouted)
PROC_ETH_TXD2  (1 unrouted)
PROC_ETH_TXD3  (1 unrouted)
PROC_FMC_A0  (1 unrouted)
PROC_FMC_A1  (1 unrouted)
PROC_FMC_A2  (1 unrouted)
PROC_FMC_A3  (1 unrouted)
PROC_FMC_A4  (1 unrouted)
PROC_FMC_A5  (1 unrouted)
PROC_FMC_A6  (1 unrouted)
PROC_FMC_A7  (1 unrouted)
PROC_FMC_A8  (1 unrouted)
PROC_FMC_A9  (1 unrouted)
PROC_FMC_A10  (1 unrouted)
PROC_FMC_A11  (1 unrouted)
PROC_FMC_A12  (1 unrouted)
PROC_FMC_A13  (1 unrouted)
PROC_FMC_A14  (1 unrouted)
PROC_FMC_A15  (1 unrouted)
PROC_FMC_A16  (1 unrouted)
PROC_FMC_A17  (1 unrouted)
PROC_FMC_A18  (1 unrouted)
PROC_FMC_A19  (1 unrouted)
PROC_FMC_A20  (1 unrouted)
PROC_FMC_A21  (1 unrouted)
PROC_FMC_A22  (1 unrouted)
PROC_FMC_A23  (1 unrouted)
PROC_FMC_A24  (1 unrouted)
PROC_FMC_CLK  (1 unrouted)
PROC_FMC_D0  (1 unrouted)
PROC_FMC_D1  (1 unrouted)
PROC_FMC_D2  (1 unrouted)
PROC_FMC_D3  (1 unrouted)
PROC_FMC_D4  (1 unrouted)
PROC_FMC_D5  (1 unrouted)
PROC_FMC_D6  (1 unrouted)
PROC_FMC_D7  (1 unrouted)
PROC_FMC_D8  (1 unrouted)
PROC_FMC_D9  (1 unrouted)
PROC_FMC_D10  (1 unrouted)
PROC_FMC_D11  (1 unrouted)
PROC_FMC_D12  (1 unrouted)
PROC_FMC_D13  (1 unrouted)
PROC_FMC_D14  (1 unrouted)
PROC_FMC_D15  (1 unrouted)
PROC_FMC_NE2  (2 unrouted)
PROC_FMC_NL  (2 unrouted)
PROC_FMC_NOE  (2 unrouted)
PROC_FMC_NWAIT  (1 unrouted)
PROC_FMC_NWE  (2 unrouted)
PROC_I2S1_CK  (1 unrouted)
PROC_I2S1_SD  (1 unrouted)
PROC_I2S1_WS  (1 unrouted)
VCC_10V1  (13 unrouted)
VCC_S1_10V1  (9 unrouted)
VCC_S2_10V1  (4 unrouted)
VCC_TIER1_1V2  (6 unrouted)
VCC_TIER1_3V3  (108 unrouted)
VCC_TIER2_1V2  (2 unrouted)